# EAGLE board PayloadV5 (EAGLE 9.0.0)
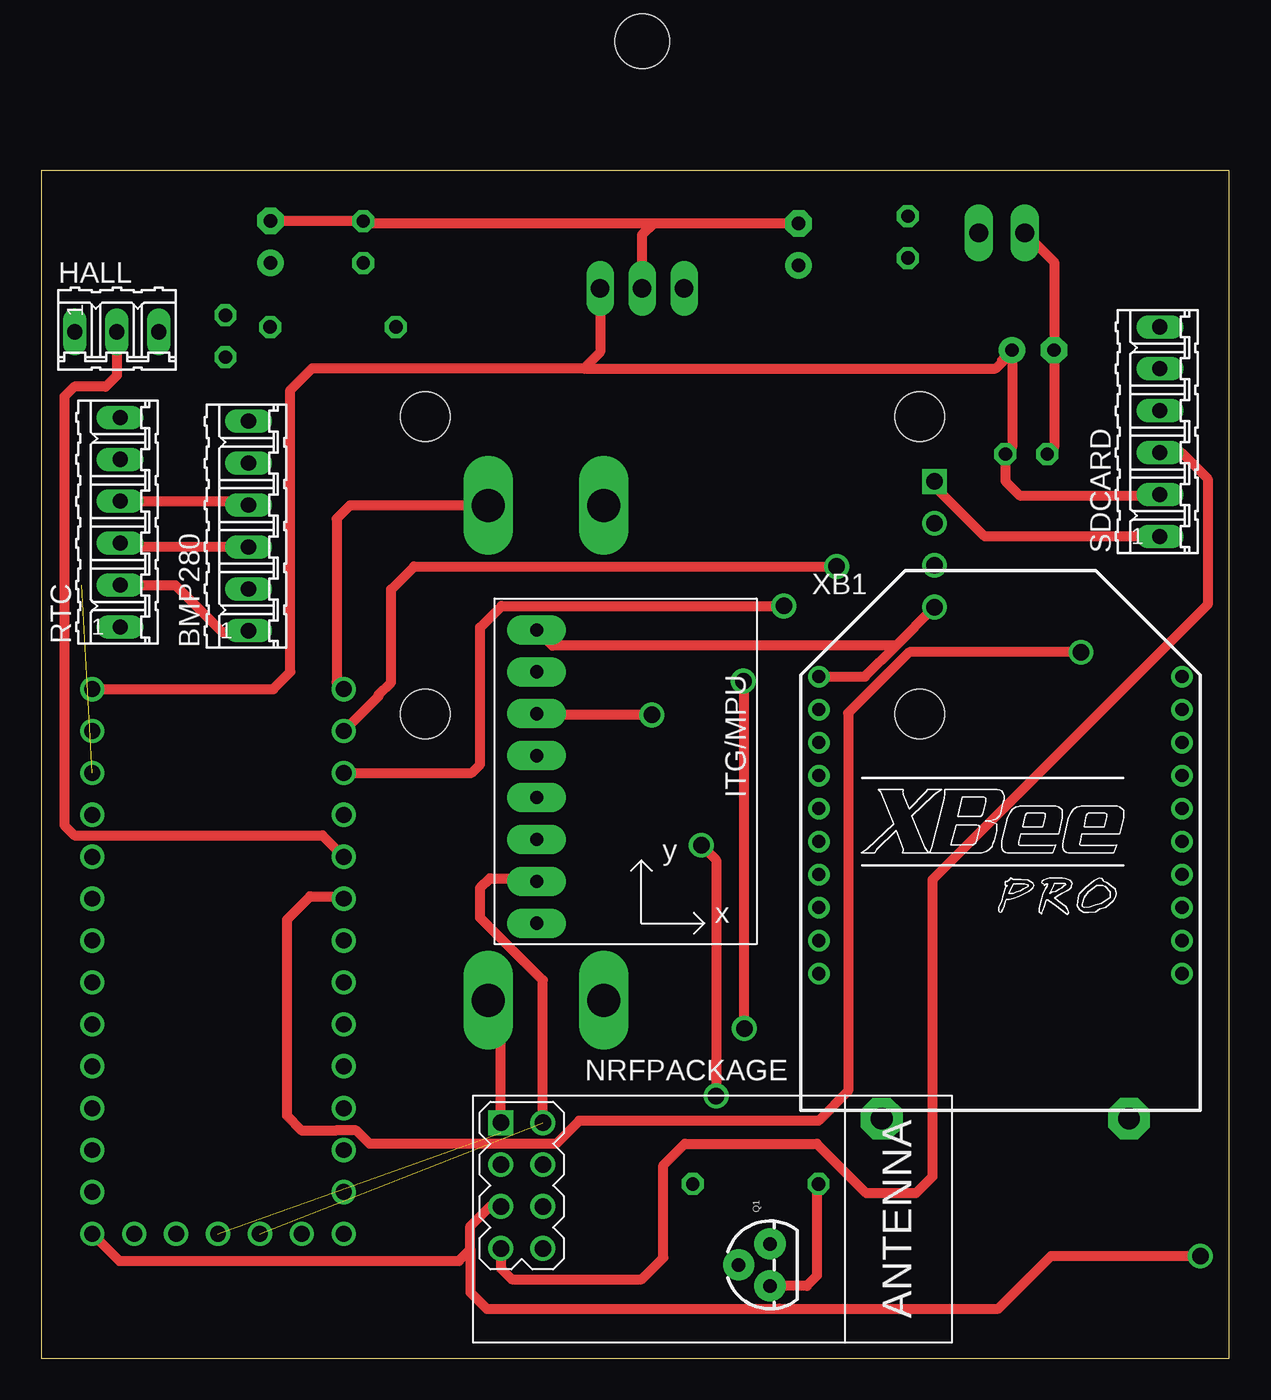
[diagram p0: board, top side]
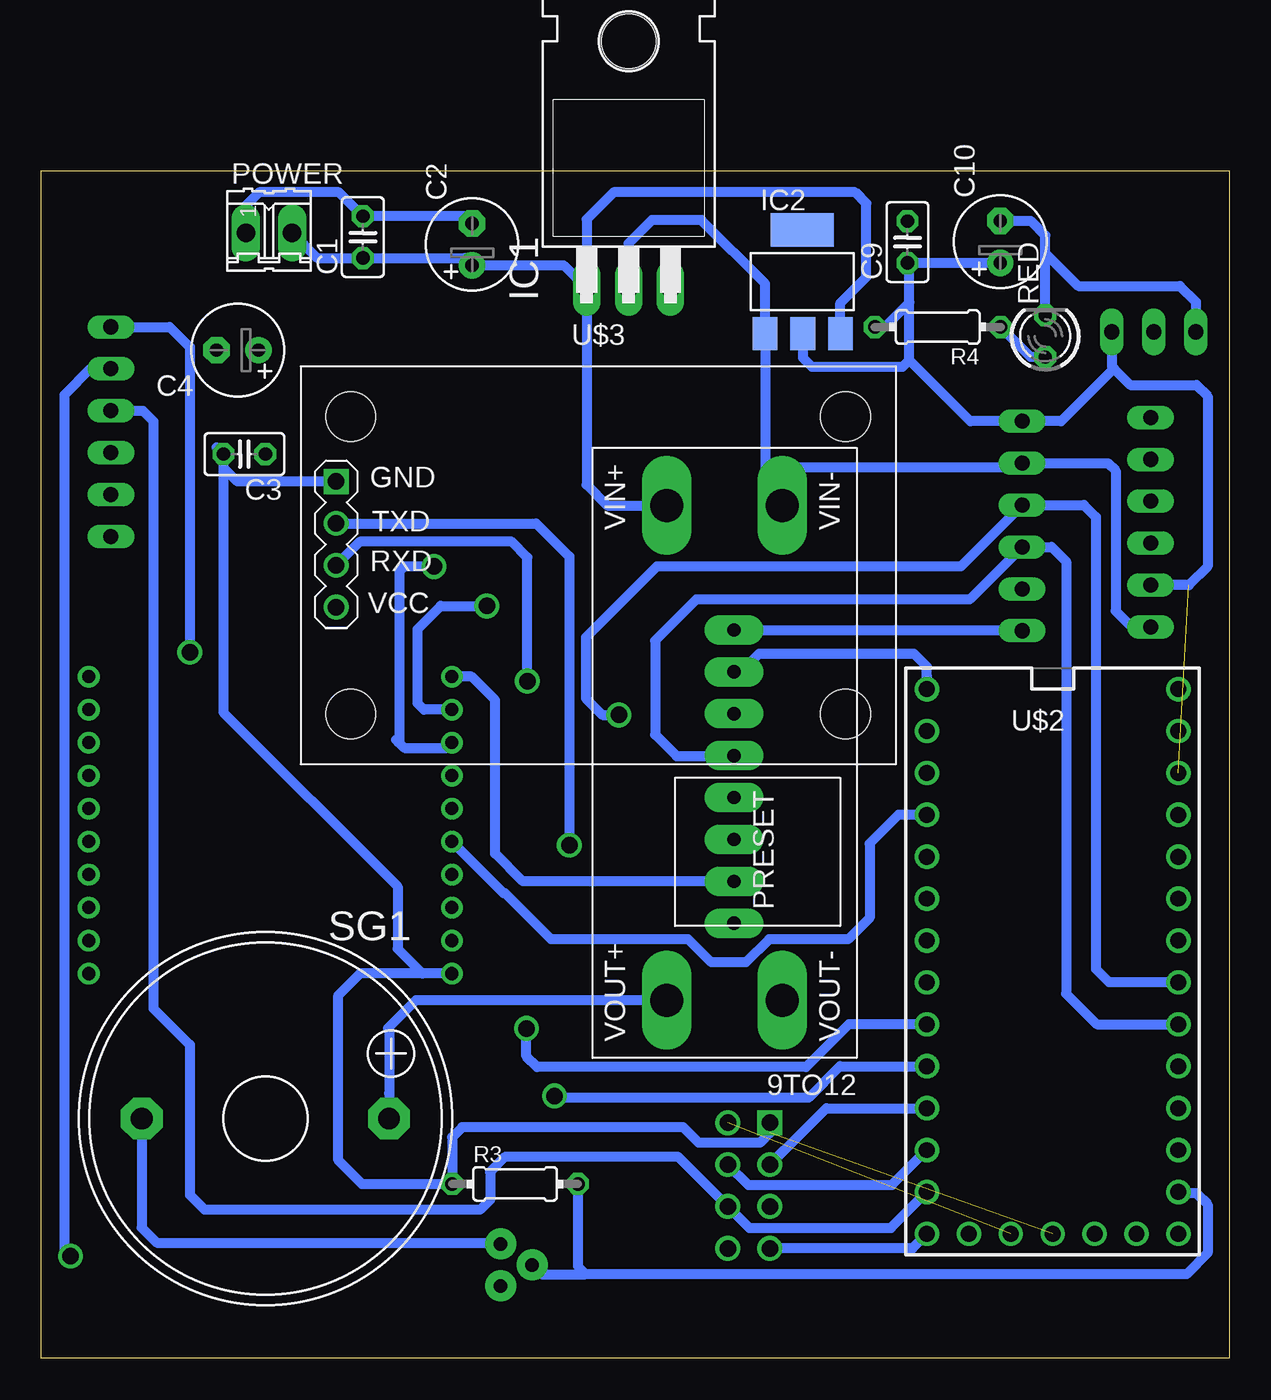
[diagram p1: board, bottom side, seen from below]

Size 72 x 72 mm. Coordinates in mm from the lower left corner, seen from the top.
Outline: 0,0 72,0 72,72 0,72 0,0
Copper layers (1*16): Top 0.035mm / dielectric 1.5mm / Bottom 0.035mm
Design rules "default *": minimum track width 6mil, minimum drill 0.35mm, track to track 6mil, track to pad 6mil, pad to pad 6mil, via to via 6mil, smd to smd 6mil, copper to edge 40mil, drill to drill 6mil, minimum pad ring 10mil, minimum via ring 8mil, stop-mask expansion 4mil, vias tented up to drill 0mil, thermal gap 10mil

## Footprints (pad centres in the part's own frame; a part is rotated, then mirrored left to right if it is on the bottom)
BREAKOUTS_MT3608_BOB = drill 2 pad 3 long: VIN+ 33.5,-4.5; VIN- 33.5,-11.5; VOUT+ 3.5,-4.5; VOUT- 3.5,-11.5
06P = drill 0.914 long: 1 -6.35,0; 2 -3.81,0; 3 -1.27,0; 4 1.27,0; 5 3.81,0; 6 6.35,0
C025-025X050 = drill 0.813 octagon: 1 -1.27,0; 2 1.27,0
E2,5-6 = drill 0.813 pad 1.6: + -1.27,0 | drill 0.813 pad 1.6 octagon: - 1.27,0
03P = drill 0.914 long: 1 -2.54,0; 2 0,0; 3 2.54,0
TO220H = drill 1.118 long: 1 -2.54,-10.16; 2 0,-10.16; 3 2.54,-10.16 | hole 3.302: 0,4.826
SOT223 = smd 1.499 x 2.007: 1 -2.261,-3.15; 2 0.025,-3.15; 3 2.311,-3.15 | smd 3.81 x 2.007: 4 0,3.15
WIRELESS-NRF24L01 = drill 1 square: 1 -12.7,6.35 | drill 1: 2 -10.16,6.35; 3 -12.7,3.81; 4 -10.16,3.81; 5 -12.7,1.27; 6 -10.16,1.27; 7 -12.7,-1.27; 8 -10.16,-1.27
CEDT_JANUARY_2015_V5_02P = drill 1.143 long: 1 -1.397,0; 2 1.397,0
SPARKFUN-DISCRETESEMI_TO-92 = drill 0.813 pad 1.88: 1 -1.27,0; 2 0,1.905; 3 1.27,0
0204/7 = drill 0.813 octagon: 1 -3.81,0; 2 3.81,0
LED3MM = drill 0.813 octagon: A -1.27,0; K 1.27,0
BUZZER_EB2209A = drill 1.321 pad 2.54 octagon: + 7.493,0; - -7.493,0
GY-521 = drill 0.8 pad 1.778 long: ADO -8.89,-6.35; GND -8.89,6.35; INT -8.89,-8.89; SCL -8.89,3.81; SDA -8.89,1.27; VCC -8.89,8.89; XCL -8.89,-3.81; XDA -8.89,-1.27
TEENSY_3.0-3.2&LC_OUTER_ROW = drill 0.965: 0 -7.62,13.97; 1 -7.62,11.43; 2 -7.62,8.89; 3 -7.62,6.35; 3.3V 7.62,11.43; 3.3V1 -2.54,-16.51; 4 -7.62,3.81; 5 -7.62,1.27; 6 -7.62,-1.27; 7 -7.62,-3.81; 8 -7.62,-6.35; 9 -7.62,-8.89; 10 -7.62,-11.43; 11 -7.62,-13.97; 12 -7.62,-16.51; 13 7.62,-16.51; 14/A0 7.62,-13.97; 15/A1 7.62,-11.43; 16/A2 7.62,-8.89; 17/A3 7.62,-6.35; 18/A4 7.62,-3.81; 19/A5 7.62,-1.27; 20/A6 7.62,1.27; 21/A7 7.62,3.81; 22/A8 7.62,6.35; 23/A9 7.62,8.89; AGND 7.62,13.97; GND -7.62,16.51; GND1 0,-16.51; PGM 2.54,-16.51; RESET/DAC 5.08,-16.51; VBAT -5.08,-16.51; VIN 7.62,16.51
GPS-RECEIVER-NEO6M = drill 1 square: GND -15.875,5.08 | drill 1: RX -15.875,0; TX -15.875,2.54; VCC -15.875,-2.54 | hole 3: -14.986,9.017; -14.986,-9.017; 14.986,-9.017; 14.986,9.017
XBEE-PRO = drill 0.8 pad 1.27: 1 -11,9; 2 -11,7; 3 -11,5; 4 -11,3; 5 -11,1; 6 -11,-1; 7 -11,-3; 8 -11,-5; 9 -11,-7; 10 -11,-9; 11 11,-9; 12 11,-7; 13 11,-5; 14 11,-3; 15 11,-1; 16 11,1; 17 11,3; 18 11,5; 19 11,7; 20 11,9

## Placement (x,y rotation side)
9TO12  BREAKOUTS_MT3608_BOB  [BREAKOUTS_MT3608_BOB]  38.59,18.2 90 bottom
BMP280  [06P]  12.56,50.45 90 top
C1  0.1u  [C025-025X050]  52.51,67.96 90 bottom
C2  10u  [E2,5-6]  45.89,67.52 90 bottom
C3  10u  [C025-025X050]  59.69,54.81 180 bottom
C4  0.1u  [E2,5-6]  60.1,61.11 180 bottom
C9  0.1u  [C025-025X050]  19.51,67.66 90 bottom
C10  10u  [E2,5-6]  13.89,67.68 90 bottom
HALL  [03P]  4.58,62.22 0 top
IC1  7805T  [TO220H]  36.41,75.01 0 bottom
IC2  REG1117  [SOT223]  25.88,65.25 0 bottom
M1  WIRELESS-NRF24L01  [WIRELESS-NRF24L01]  40.55,7.93 0 top
POWER  [CEDT_JANUARY_2015_V5_02P]  58.2,68.22 0 bottom
Q1  SPARKFUN-DISCRETESEMI_MOSFET-NCHANNEL2N7000  [SPARKFUN-DISCRETESEMI_TO-92]  44.16,5.66 90 top
R3  [0204/7]  43.29,10.57 0 bottom
R4  1k  [0204/7]  17.68,62.51 180 bottom
RED  red  [LED3MM]  11.16,61.96 90 bottom
RTC  [06P]  4.78,50.68 90 top
SDCARD  [06P]  67.78,56.17 90 top
SG1  BUZZER_EB2209A  [BUZZER_EB2209A]  58.42,14.53 0 bottom
U1  GY-521MPU6050  [GY-521]  38.91,35.26 0 top
U$2  TEENSY_3.1-3.2_OUTER_ROW  [TEENSY_3.0-3.2&LC_OUTER_ROW]  10.71,24.05 0 bottom
U$3  GPS-RECEIVER-NEO6M  [GPS-RECEIVER-NEO6M]  38.25,48.07 0 bottom
XB1  XBEE-PRO  [XBEE-PRO]  58.12,32.32 0 top

## Library data of the parts
9TO12 POWER Q1 = Cansat2019_3279_Container_v01
BMP280 HALL RTC SDCARD = con-amp-quick; OC_FARNELL: unknown; OC_NEWARK: unknown
C1 C3 C9 = resistor
C2 C4 C10 = rcl; SPICEPREFIX: C
IC1 = linear
IC2 RED = CEDT_JANUARY_2015_v5
M1 U$3 = diy-modules
R3 R4 = rcl; SPICEPREFIX: R
SG1 = Cansat2019_3279_Container_v01; OC_FARNELL: unknown; OC_NEWARK: unknown
U1 = gy-521
U$2 = Teensy_3_and_LC_Series_Boards_v1.4
XB1 = maxstream; MPN: XBP24-AWI-001; OC_FARNELL: 1337916; OC_NEWARK: 42M2667

## Nets
3.3V: BMP280.1 BMP280.6 C9.1 C10.+ HALL.3 IC2.2 M1.2 R4.2 RTC.2 U1.ADO U1.VCC U$2.3.3V U$2.3.3V1 U$3.VCC XB1.1
5V: C3.1 C4.+ IC1.3 SDCARD.2 U$2.VIN
9V: 9TO12.VIN+ C1.1 C2.+ IC1.1 IC2.3 POWER.2
32K: RTC.6
+12V: 9TO12.VOUT+ SG1.+
AGND: U$2.AGND
BUZZER: Q1.2 R3.2 U$2.14/A0
CSNNRF: M1.4 U$2.10
CSNRF: M1.3 U$2.9
CSSDCARD: SDCARD.6 U$2.4
GND: 9TO12.VIN- 9TO12.VOUT- BMP280.5 C1.2 C2.- C3.2 C4.- C9.2 C10.- HALL.1 IC1.2 IC2.1 M1.1 POWER.1 Q1.1 R3.1 RED.K RTC.1 SDCARD.1 U1.GND U$2.GND U$2.GND1 U$3.GND XB1.10
HALLIP: HALL.2 U$2.3
MISO: M1.7 SDCARD.3 U$2.12
MOSI: M1.6 SDCARD.4 U$2.11
N$2: R4.1 RED.A
N$3: Q1.3 SG1.-
RSSI: U$2.2 XB1.6
RXBEE: U$2.1 XB1.2
RXGPS: U$2.8 U$3.TX
SCK: M1.5 SDCARD.5 U$2.13
SCL: BMP280.4 RTC.4 U1.SCL U$2.19/A5
SDA: BMP280.3 RTC.3 U1.SDA U$2.18/A4
SQW: RTC.5
TXBEE: U$2.0 XB1.3
TXGPS: U$2.7 U$3.RX
VBAT: U$2.VBAT

## Tracks (layer width: path | path; a pad name or v marks a point on that pad's centre or on a via)
3.3V  (2 unrouted)
  Top 0.61: RTC.2 8.13,46.87 11,44 12,44 12.1,44.1 BMP280.1 | XB1.1 49.91,41.32 51.8,43.2 | 51.8,43.2 U$3.VCC | M1.2 30.39,22.91 26.6,26.7 26.6,28.5 27.2,29.1 29.83,29.1 U1.ADO | 51.8,43.2 30.97,43.2 U1.VCC
  Bottom 0.61: IC2.2 25.86,60.66 25.3,60.1 19.8,60.1 19.4,60.5 | C10.+ 13.91,66.39 19,66.39 | 19,66.39 C9.1 | 19.4,60.5 19.4,64 | 19.4,64 19.4,65.99 19,66.39 | R4.2 20.89,62.51 19.4,64 | HALL.3 7.12,60.12 7,60 | 7,60 10.2,56.8 BMP280.6 15.7,56.8 19.4,60.5 | 7,60 6,59 2,59 1.32,58.32 1.32,48 2.45,46.87 RTC.2 | BMP280.1 29.97,44.1 U1.VCC | U1.ADO 42.81,28.91 44.5,30.6 44.5,39.9 45.92,41.32 XB1.1
5V
  Top 0.61: IC1.3 33.87,61 32.87,60 | 58.22,60.5 C4.+ 58.83,61 | 58.83,61 58.83,55.22 C3.1 58.42,53.18 59.3,52.3 67.72,52.3 SDCARD.2 | 32.87,60 16.4,60 15.1,58.7 15.1,41.6 14.06,40.56 U$2.VIN | 32.87,60 57.83,60 58.83,61
9V
  Bottom 0.61: POWER.2 55.27,66.69 C1.1 46.33,66.69 C2.+ 40.35,66.25 IC1.1 | IC1.1 38.95,69.05 37.32,70.68 22.68,70.68 22,70 22,65.54 23.57,63.97 IC2.3 | IC1.1 38.95,52.95 37.7,51.7 9TO12.VIN+
+12V
  Bottom 0.61: 50.93,16.07 SG1.+ 50.93,19.93 51,20 49.3,21.7 9TO12.VOUT+
BUZZER
  Bottom 0.61: U$2.14/A0 3.01,10 2,10 1.32,9.32 1.32,6.38 2.6,5.1 39,5.1 | 39,5.1 39.48,5.58 R3.2 | Q1.2 41.7,5.1 39,5.1
CSNNRF
  Bottom 0.61: M1.4 29.15,10.5 20.45,10.5 U$2.10
CSNRF
  Bottom 0.61: 26.97,12.62 M1.3 24.43,15.16 U$2.9
CSSDCARD  (via drill 1 pad 1.5)
  Top 0.61: v63,42.8 52.6,42.8 48.9,39.1 48.9,16.2 47.1,14.4 32.6,14.4 31.2,13 19.9,13 19.09,13.81 17.84,13.81 17.82,13.8 15.8,13.8 14.9,14.7 14.9,26.6 16.3,28 18.19,28 U$2.4
  Bottom 0.61: SDCARD.6 64.22,62.52 63,61.3 v63,42.8
GND  (1 unrouted)
  Top 0.61: C2.- 37.09,68.79 | 37.09,68.79 36.4,68.1 IC1.2 | 37.09,68.79 19.65,68.79 C9.2 13.91,68.93 C10.- | R3.1 47,10.47 47,5 46.39,4.39 Q1.1 | POWER.1 61.37,66.45 C4.- 61.37,55.22 C3.2 | SDCARD.1 57.18,49.82 54.12,52.88 U$3.GND | 9TO12.VIN- 18.7,51.7 17.9,50.9 17.9,40.99 U$2.GND | M1.1 27.85,20.94 9TO12.VOUT-
  Bottom 0.61: C2.- 46.33,69.23 C1.2 53.96,70.68 58.8,70.68 59.6,69.88 POWER.1 | 61.37,55.22 C3.2 | C3.2 60.96,54 60.11,53.15 U$3.GND | RED.K 11.16,67 | 11.16,67 11.16,68.06 12.05,68.95 C10.- | 11.16,67 9.16,65 3,65 2.04,64.04 HALL.1 | 27.2,51.8 28.14,52.75 IC2.1 28.14,65.14 32,69 35,69 36.41,67.59 IC1.2 | 27.2,51.8 9TO12.VIN- | 18.33,41.33 U$2.GND 18.33,41.93 19.1,42.7 28.51,42.7 29.6,41.61 U1.GND | 27.2,51.8 27.2,52.8 26,54 12.82,54 BMP280.5 7.36,54.26 6.9,53.8 6.9,45.3 5.93,44.33 RTC.1 | XB1.10 48.9,23.32 | 48.9,23.32 52.68,23.32 54,22 54,12 52.57,10.57 52.53,10.57 52,10.57 R3.1 47.1,13.4 46.5,14 33.1,14 32.17,13.07 28.43,13.07 27.85,13.65 M1.1 | C3.2 60.96,39.16 50.4,28.6 50.4,24.82 48.9,23.32
HALLIP
  Top 0.61: HALL.2 4.58,59.58 3.9,58.9 2,58.9 1.4,58.3 1.4,32.3 2,31.7 17.03,31.7 U$2.3
MISO
  Top 0.61: SDCARD.3 69.1,54.9 70.68,53.32 70.68,45.68 54,29 54,11 53,10 50,10 47,13 39,13 37.7,11.7 37.7,6.1 36.4,4.8 28.5,4.8 27.85,5.45 M1.7
  Bottom 0.61: U$2.12 19.21,6.66 M1.7
MOSI
  Bottom 0.61: U$2.11 20.51,7.9 29.09,7.9 M1.6 33.39,12.2 43.9,12.2 44.8,11.3 44.8,9.6 45.4,9 62.1,9 63,9.9 63,19 65.2,21.2 65.2,56.8 65.84,57.44 SDCARD.4
N$2
  Bottom 0.61: RED.A 12.05,60.69 R4.1
N$3
  Bottom 0.61: SG1.- 65.91,7.91 65,7 44.23,7 Q1.3
RSSI
  Bottom 0.61: XB1.6 44,28.2 43.9,28.2 41.1,25.4 32.8,25.4 31.4,24 29.3,24 27.9,25.4 23.1,25.4 21.8,26.7 21.8,31.2 20.06,32.94 U$2.2
RXBEE  (via drill 1 pad 1.5)
  Top 0.61: v45,45.6 27.9,45.6 26.6,44.3 26.6,36 26.08,35.48 U$2.1
  Bottom 0.61: XB1.2 48.82,39.32 49.2,39.7 49.2,44.2 47.8,45.6 v45,45.6
RXGPS  (via drill 1 pad 1.5)
  Top 0.61: v40,31.1 40.9,30.2 v40.9,15.9
  Bottom 0.61: U$3.TX 42.01,50.61 40,48.6 v40,31.1 | U$2.8 23.6,17.7 25.5,15.8 40.8,15.8 v40.9,15.9
SCK  (via drill 1 pad 1.5)
  Top 0.61: 26,6.6 26,8 27.2,9.2 M1.5 | v70.23,6.2 61.2,6.2 58,3 44.75,3 44.74,2.99 27,2.99 26,3.99 26,6.6 | U$2.13 4.73,5.9 25.3,5.9 26,6.6
  Bottom 0.61: SDCARD.5 69.02,59.98 70.6,58.4 70.6,6.57 v70.23,6.2
SCL  (via drill 1 pad 1.5)
  Top 0.61: RTC.4 12.33,51.95 BMP280.4 | v37,39 30.09,39 U1.SCL
  Bottom 0.61: v37,39 38,39 39,40 39,43.7 34.7,48 16.28,48 BMP280.4 8.82,51.72 8.1,51 8.1,23.6 7.3,22.8 3.11,22.8 U$2.19/A5
SDA
  Top 0.61: BMP280.3 4.18,49.18 | 4.18,49.18 4,49 | 4.18,49.18 4.41,49.41 RTC.3 | 29.95,36.6 U1.SDA
  Bottom 0.61: U1.SDA 30.05,36.5 33.5,36.5 34.8,37.8 34.8,43.5 32.3,46 15.74,46 15.37,46.37 BMP280.3 10.78,49.18 9.9,48.3 9.9,22.1 8.04,20.24 U$2.18/A4
TXBEE  (via drill 1 pad 1.5)
  Top 0.61: v48.2,48 22.6,48 21.2,46.6 21.2,40.98 20.44,40.22 20.44,40.13 U$2.0
  Bottom 0.61: 50.5,37.5 50.3,37.3 | 50.3,37.3 50,37 47.44,37 XB1.3 | v48.2,48 50,48 50.3,47.7 50.3,37.3
TXGPS  (via drill 1 pad 1.5)
  Top 0.61: v42.6,19.99 42.6,41 v42.55,41.05
  Bottom 0.61: U$2.7 23.06,20.24 25.65,17.65 41.95,17.65 42.6,18.3 v42.6,19.99 | U$3.RX 52.7,49.5 43.5,49.5 42.55,48.55 v42.55,41.05